# Altium PCB BOARD 1.pcbdoc
Units mil, origin at the board's own origin, x right, y up, seen from the top; angles counter-clockwise.
Board outline 5016 x 3650 mil, 2 copper layers (TopLayer, BottomLayer); 37 components, 98 nets, 554 pads, 0 vias.
Unrouted connection lines stored in the file: 286.
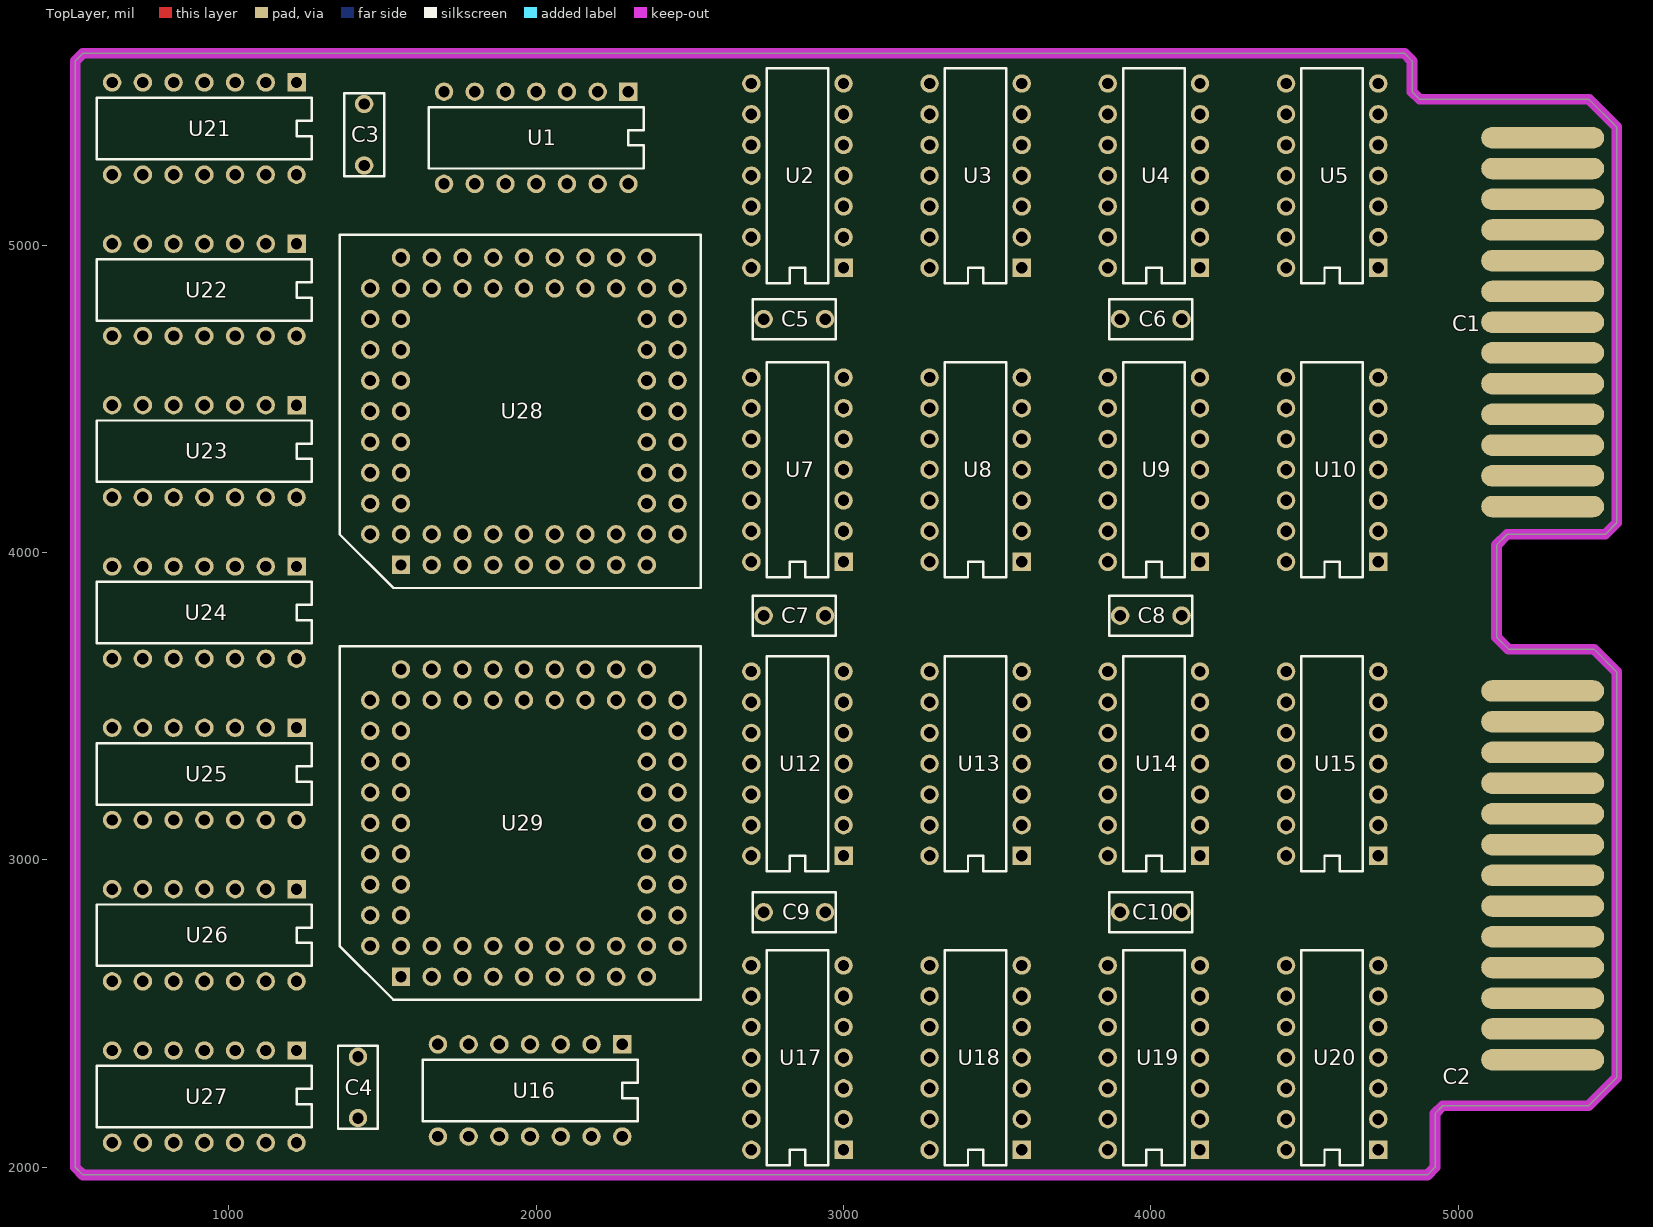
[diagram p0: TopLayer view]
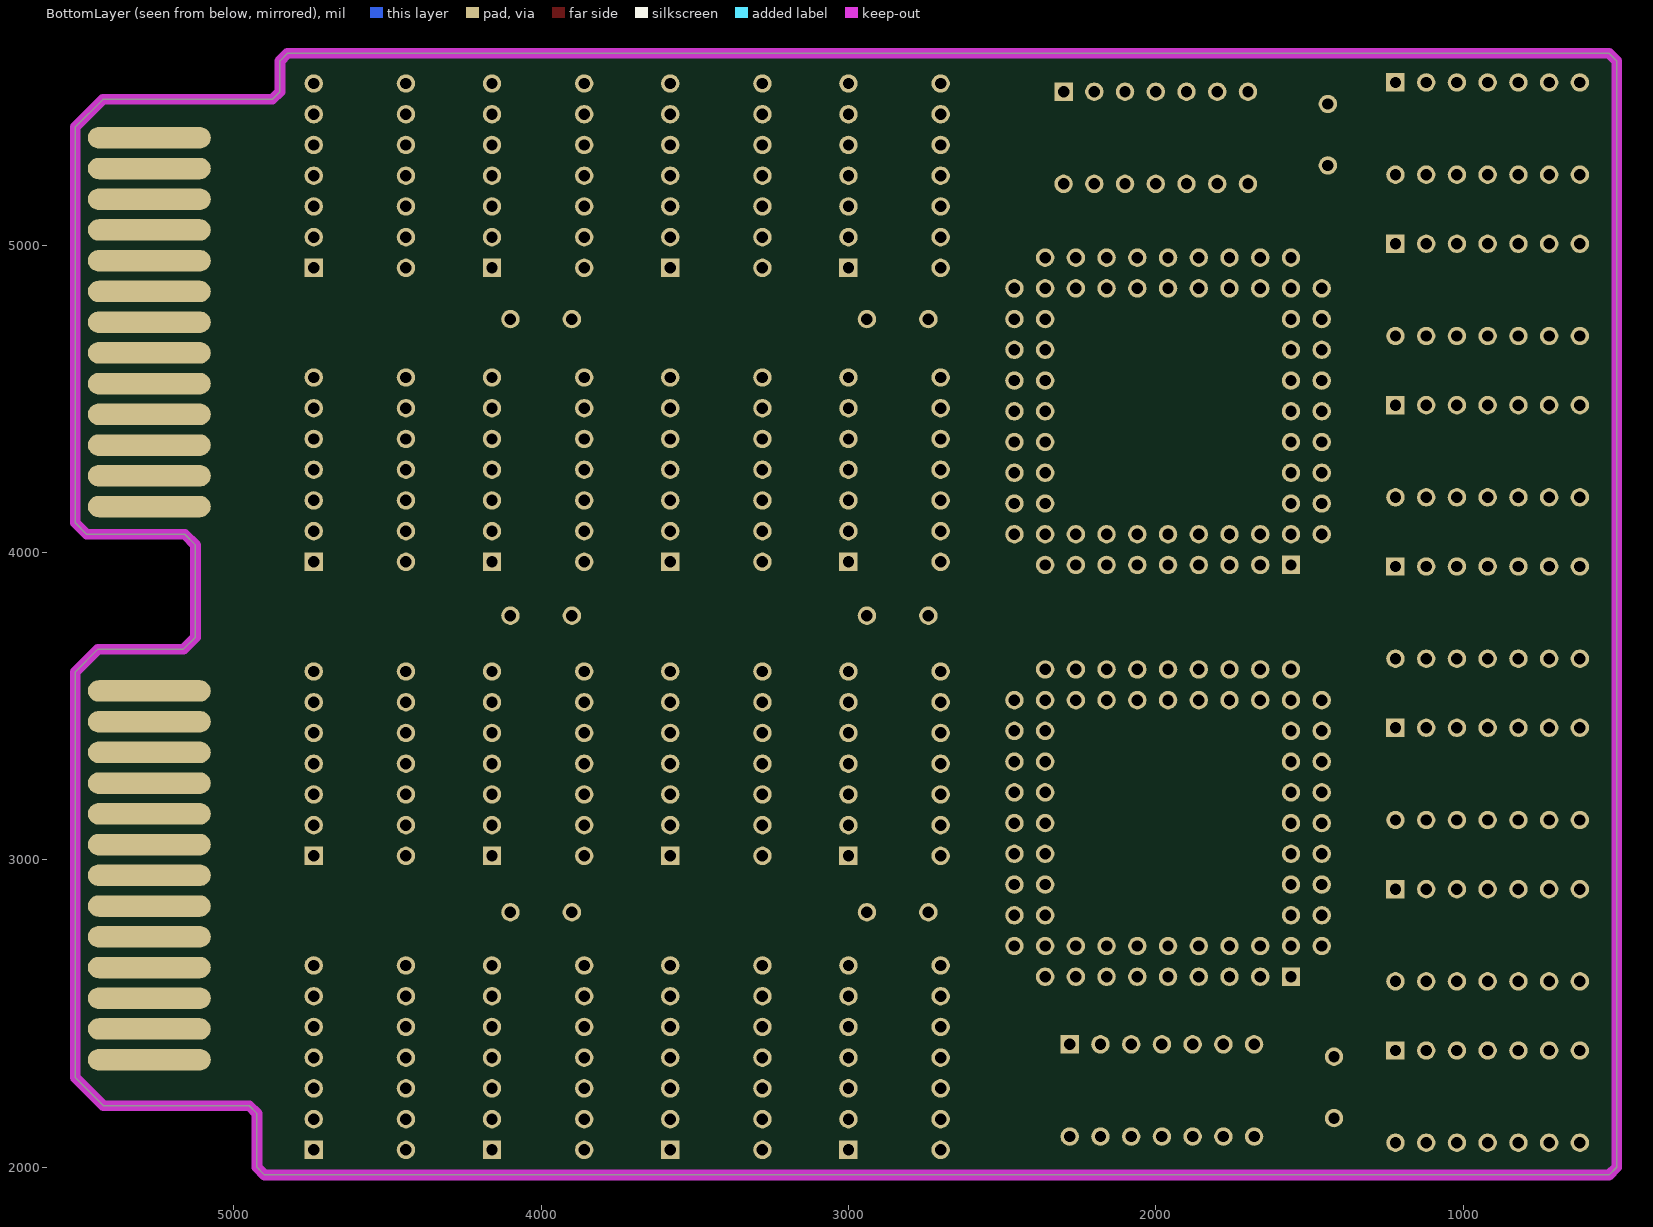
[diagram p1: BottomLayer view, seen from below]

## Layer stack, top to bottom
TopLayer: signal copper 1.4
Dielectric: core 12.6, FR-4, Dk 4.8
BottomLayer: signal copper 1.4

## Board outline
500,2000 525,1975 4900,1975 4925,2000 4925,2175 4950,2200 5424,2200 5516,2292 5516,3612 5442,3686 5164,3686 5125,3725 5125,4025 5160,4060 5479,4060 5516,4097 5516,5385 5426,5475 4875,5475 4850,5500 4850,5600 4825,5625 525,5625 500,5600 500,2000

## Design rules (kind name [scope] priority, off if disabled: settings)
Clearance [All] p1: gap=13
FabricationTestPointUsage TestPointUsage [All] p1: valid=0 allowmultiple=FALSE
FabricationTestpoint Testpoint [All] p1: side=3 testpointundercomponent=TRUE minsize=40 maxsize=100 preferedsize=60 minholesize=20 maxholesize=40 preferedholesize=32 testpointgrid=1 allowsidetop=TRUE allowsidebottom=TRUE usegrid=TRUE gridtolerance=0.01
PlaneClearance [All] p1: clearance=10
PolygonConnect [All] p1: connectstyle=Relief reliefconductorwidth=10 reliefentries=4 polygonreliefangle="90 Angle"
RoutingPriority RoutingPriority_Power [InNetClass('Power')] p1: routingpriority=10
RoutingPriority [All] p2: routingpriority=0
RoutingTopology [InNet('GND')] p1: topology=Vertical
RoutingTopology RoutingTopology_1 [InNet('VCC')] p2: topology=Vertical
RoutingTopology RoutingTopology_2 [All] p3: topology=Shortest
RoutingVias [All] p1: holewidth=20 width=50 viastyle="Through Hole" minholewidth=20 minwidth=50 maxholewidth=20 maxwidth=50
SilkscreenOverComponentPads [All] p1: minsilkscreentomaskgap=10
SolderMaskExpansion [All] p1: expansion=2
Width Width_Power [InNetClass('Power')] p1: maxlimit=25 minlimit=25 preferedwidth=25
Width Width_All [All] p2: maxlimit=12 minlimit=12 preferedwidth=12
22 further rules are at their usual default settings.

## Classes and differential pairs
net class Power: GND VCC

## Components (designator, comment, footprint, x,y, rotation, side; value= is the part's Value field where it differs from the comment)
C1 "CON\26P\ED" CON\26P\ED 5275,4150 r90 top
C2 "CON\26P\ED" CON\26P\ED 5275,2350 r90 top
C3 "CAP" DCAP\SR21 1440,5260 r90 top
C4 "CAP" DCAP\SR21 1420,2160 r90 top
C5 "CAP" DCAP\SR21 2940,4760 r180 top
C6 "CAP" DCAP\SR21 4100,4760 r180 top
C7 "CAP" DCAP\SR21 2940,3795 r180 top
C8 "CAP" DCAP\SR21 4100,3795 r180 top
C9 "CAP" DCAP\SR21 2940,2830 r180 top
C10 "CAP" DCAP\SR21 4100,2830 r180 top
U1 "7404" DIP14 2300,5500 r180 top
U2 "7404" DIP14 3000,4926.67 r90 top
U3 "7404" DIP14 3580,4926.67 r90 top
U4 "7404" DIP14 4160,4926.67 r90 top
U5 "7404" DIP14 4740,4926.67 r90 top
U7 "7404" DIP14 3000,3970 r90 top
U8 "7404" DIP14 3580,3970 r90 top
U9 "7404" DIP14 4160,3970 r90 top
U10 "7404" DIP14 4740,3970 r90 top
U12 "7404" DIP14 3000,3013.33 r90 top
U13 "7404" DIP14 3580,3013.33 r90 top
U14 "7404" DIP14 4160,3013.33 r90 top
U15 "7404" DIP14 4740,3013.33 r90 top
U16 "7404" DIP14 2280,2400 r180 top
U17 "7404" DIP14 3000,2056.67 r90 top
U18 "7404" DIP14 3580,2056.67 r90 top
U19 "7404" DIP14 4160,2056.67 r90 top
U20 "7404" DIP14 4740,2056.67 r90 top
U21 "7404" DIP14 1220,5530 r180 top
U22 "7404" DIP14 1220,5005 r180 top
U23 "7404" DIP14 1220,4480 r180 top
U24 "7404" DIP14 1220,3955 r180 top
U25 "7404" DIP14 1220,3430 r180 top
U26 "7404" DIP14 1220,2905 r180 top
U27 "7404" DIP14 1220,2380 r180 top
U28 "8397" PGA\68P 1560,3960 r0 top
U29 "8397" PGA\68P 1560,2620 r0 top

## Footprints (in the part's own frame and the unit in brackets; to place one, negate y for a bottom-side part, rotate by r counter-clockwise, add the part's x,y. Pads: shape width x height; smd on the part's side, far side on the other; paste and mask are expansions set on the pad)
CON\26P\ED [mil]
  oval 70x400 smd: 1(0,0) 3(100,0) 5(200,0) 7(300,0) 9(400,0) 11(500,0) 13(600,0) 15(700,0) 17(800,0) 19(900,0) 21(1000,0) 23(1100,0) 25(1200,0)
  oval 70x400 smd far side: 2(0,0) 4(100,0) 6(200,0) 8(300,0) 10(400,0) 12(500,0) 14(600,0) 16(700,0) 18(800,0) 20(900,0) 22(1000,0) 24(1100,0) 26(1200,0)
DCAP\SR21 [mil]
  round 60 hole 37: 1(0,0) 2(200,0)
  silkscreen extent -35,-65 235,65
DIP14 [mil]
  rect 60x60 hole 37: 1(0,0)
  round 60 hole 37: 2(100,0) 3(200,0) 4(300,0) 5(400,0) 6(500,0) 7(600,0) 8(600,300) 9(500,300) 10(400,300) 11(300,300) 12(200,300) 13(100,300) 14(0,300)
  silkscreen extent -50,50 650,250
PGA\68P [mil]
  rect 60x60 hole 37: 1(0,0)
  round 60 hole 37: 2(0,100) 3(100,0) 4(100,100) 5(200,0) 6(200,100) 7(300,0) 8(300,100) 9(400,0) 10(400,100) 11(500,0) 12(500,100) 13(600,0) 14(600,100) 15(700,0) 16(700,100) 17(800,0) 18(900,100) 19(800,100) 20(900,200) 21(800,200) 22(900,300) 23(800,300) 24(900,400) 25(800,400) 26(900,500) 27(800,500) 28(900,600) 29(800,600) 30(900,700) 31(800,700) 32(900,800) 33(800,800) 34(900,900) 35(800,1000) 36(800,900) 37(700,1000) 38(700,900) 39(600,1000) 40(600,900) 41(500,1000) 42(500,900) 43(400,1000) 44(400,900) 45(300,1000) 46(300,900) 47(200,1000) 48(200,900) 49(100,1000) 50(100,900) 51(0,1000) 52(-100,900) 53(0,900) 54(-100,800) 55(0,800) 56(-100,700) 57(0,700) 58(-100,600) 59(0,600) 60(-100,500) 61(0,500) 62(-100,400) 63(0,400) 64(-100,300) 65(0,300) 66(-100,200) 67(0,200) 68(-100,100)
  silkscreen extent -200,-75 975,1075

## Nets (pads, with @x,y where several pads share a name; then routed paths per layer and width w, separated by ;. In a path a pad name is that pad's centre, name@x,y a point inside that pad or via, vN(x,y) a via of type N, cw(c..) or ccw(c..) an arc to the next point about the centre after c; other vN are vias at no path point)
DY: U21.10 U22.10 U23.10 U24.10 U25.10 U26.10 U27.10 U29.54
F: U21.5 U22.5 U23.5 U24.5 U25.5 U26.5 U27.5 U28.64
GND: C2.1 C3.1 C4.1 C5.2 C6.2 C7.2 C8.2 C9.2 C10.2 U1.14 U2.14 U3.14 U4.14 U5.14 U7.14 U8.14 U10.14 U12.14 U13.14 U14.14 U15.14 U16.14 U17.14 U18.14 U19.14 U20.14 U21.14 U22.14 U23.14 U24.14 U25.14 U26.14 U27.14 U28.51 U29.51
NetC1_1: C1.1 U19.4
NetC1_2: C1.2 U14.6
NetC1_5: C1.5 U7.9 U14.10 U29.57
NetC1_6: C1.6 U9.6
NetC1_9: C1.9 U13.2
NetC1_11: C1.11 U3.2 U5.12 U17.4
NetC1_12: C1.12 U4.8
NetC1_15: C1.15 U12.13
NetC1_17: C1.17 U5.4
NetC1_21: C1.21 U7.11
NetC1_22: C1.22 U5.13
NetC1_23: C1.23 U9.10
NetC1_25: C1.25 U4.6
NetC2_3: C2.3 U7.8
NetC2_7: C2.7 U19.9
NetC2_9: C2.9 U13.5 U29.59
NetC2_13: C2.13 U28.26
NetC2_17: C2.17 U9.9 U10.13 U19.5
NetC2_19: C2.19 U28.63 U29.12
NetC2_23: C2.23 U18.6
NetC2_25: C2.25 U3.3
NetU1_2: U1.2 U8.1 U14.1 U20.6
NetU1_5: U1.5 U10.1 U18.9
NetU1_6: U1.6 U7.10 U14.5 U20.3
NetU1_10: U1.10 U8.10 U17.10
NetU1_11: U1.11 U28.47
NetU1_13: U1.13 U2.6 U7.2 U16.13
NetU2_1: U2.1 U28.32
NetU2_2: U2.2 U28.44
NetU2_4: U2.4 U20.5
NetU2_5: U2.5 U9.5
NetU2_9: U2.9 U28.55
NetU2_10: U2.10 U28.46
NetU2_11: U1.3 U2.11 U8.5 U10.5 U14.9 U20.4 U28.49
NetU2_12: U2.12 U3.13 U13.6 U20.9
NetU2_13: U2.13 U3.12 U7.12 U10.2 U13.3 U18.13 U28.28
NetU3_5: U3.5 U28.22
NetU3_6: U3.6 U28.61
NetU3_9: U3.9 U28.65
NetU3_10: U3.10 U5.5 U12.10 U16.1
NetU4_2: U4.2 U5.9 U10.11 U14.3
NetU4_3: U4.3 U9.13 U10.6
NetU4_4: U1.4 U4.4 U8.3
NetU4_9: U4.9 U5.3 U10.10 U14.13 U17.12
NetU4_10: U4.10 U15.2
NetU4_13: U4.13 U8.6 U13.11 U17.13
NetU5_6: U5.6 U8.9 U12.9 U13.12 U14.4
NetU7_13: U7.13 U10.9 U16.12
NetU8_4: U8.4 U15.4 U19.11
NetU8_8: U8.8 U28.68
NetU9_11: U9.11 U15.12 U16.11
NetU10_4: U10.4 U12.8
NetU12_1: U12.1 U28.12 U28.50
NetU12_2: U12.2 U14.2
NetU12_3: U12.3 U18.2 U20.1 U20.11
NetU12_6: U12.6 U29.33
NetU12_12: U12.12 U29.42
NetU13_4: U13.4 U15.9 U19.1
NetU13_13: U13.13 U29.25
NetU15_3: C2.24 U15.3
NetU15_5: C2.8 U15.5
NetU15_10: U15.10 U19.10 U20.2
NetU15_11: U15.11 U16.10 U19.12
NetU15_13: C2.4 U15.13
NetU16_2: U16.2 U29.13
NetU16_3: U16.3 U29.5
NetU16_4: U16.4 U29.9 U29.58
NetU16_6: U16.6 U18.3
NetU16_9: U16.9 U29.29
NetU17_2: U17.2 U20.8
NetU17_6: U17.6 U29.63
NetU17_9: U17.9 U29.20
NetU20_10: C2.15 U20.10
NetU20_13: C2.11 U20.13
NetU21_1: U21.1 U22.1 U23.1 U24.1 U25.1 U26.1 U27.1 U28.57
NetU21_2: U21.2 U22.2 U23.2 U24.2 U25.2 U26.2 U27.2 U28.58
NetU21_3: U21.3 U22.3 U23.3 U24.3 U25.3 U26.3 U27.3 U28.60
NetU21_4: U21.4 U22.4 U23.4 U24.4 U25.4 U26.4 U27.4 U28.62
NetU21_6: U21.6 U22.6 U23.6 U24.6 U25.6 U26.6 U27.6 U28.66
NetU21_8: U21.8 U22.8 U23.8 U24.8 U25.8 U26.8 U27.8
NetU21_9: U21.9 U22.9 U23.9 U24.9 U25.9 U26.9 U27.9 U29.52
NetU21_11: U21.11 U22.11 U23.11 U24.11 U25.11 U26.11 U27.11 U29.56
NetU21_12: U21.12 U22.12 U23.12 U24.12 U25.12 U26.12 U27.12 U29.60
NetU21_13: U21.13 U22.13 U23.13 U24.13 U25.13 U26.13 U27.13 U29.62
NetU28_9: U28.9 U29.43
NetU28_11: U28.11 U29.35
NetU28_15: U28.15 U29.28
NetU28_16: U28.16 U28.59
NetU28_17: U28.17 U29.6
NetU28_18: U28.18 U29.2
NetU28_20: U28.20 U28.54
NetU28_27: U28.27 U29.4
NetU29_16: U29.16 U29.45
NetU29_22: U29.22 U29.61
VCC: C1.3 C3.2 C4.2 C5.1 C6.1 C7.1 C8.1 C9.1 C10.1 U1.7 U2.7 U3.7 U4.7 U5.7 U7.7 U8.7 U9.7 U10.7 U14.7 U15.7 U16.7 U17.7 U18.7 U19.7 U20.7 U21.7 U22.7 U23.7 U24.7 U25.7 U26.7 U27.7 U28.34 U29.34
pads on no net: C1.4 C1.7 C1.8 C1.10 C1.13 C1.14 C1.16 C1.18 C1.19 C1.20 C1.24 C1.26 C2.2 C2.5 C2.6 C2.10 C2.12 C2.14 C2.16 C2.18 C2.20 C2.21 C2.22 C2.26 U1.1 U1.8 U1.9 U1.12 U2.3 U2.8 U3.1 U3.4 U3.8 U3.11 U4.1 U4.5 U4.11 U4.12 U5.1 U5.2 U5.8 U5.10 U5.11 U7.1 U7.3 U7.4 U7.5 U7.6 U8.2 U8.11 U8.12 U8.13 U9.1 U9.2 U9.3 U9.4 U9.8 U9.12 U9.14 U10.3 U10.8 U10.12 U12.4 U12.5 U12.7 U12.11 U13.1 U13.7 U13.8 U13.9 U13.10 U14.8 U14.11 U14.12 U15.1 U15.6 U15.8 U16.5 U16.8 U17.1 U17.3 U17.5 U17.8 U17.11 U18.1 U18.4 U18.5 U18.8 U18.10 U18.11 U18.12 U19.2 U19.3 U19.6 U19.8 U19.13 U20.12 U28.1 U28.2 U28.3 U28.4 U28.5 U28.6 U28.7 U28.8 U28.10 U28.13 U28.14 U28.19 U28.21 U28.23 U28.24 U28.25 U28.29 U28.30 U28.31 U28.33 U28.35 U28.36 U28.37 U28.38 U28.39 U28.40 U28.41 U28.42 U28.43 U28.45 U28.48 U28.52 U28.53 U28.56 U28.67 U29.1 U29.3 U29.7 U29.8 U29.10 U29.11 U29.14 U29.15 U29.17 U29.18 U29.19 U29.21 U29.23 U29.24 U29.26 U29.27 U29.30 U29.31 U29.32 U29.36 U29.37 U29.38 U29.39 U29.40 U29.41 U29.44 U29.46 U29.47 U29.48 U29.49 U29.50 U29.53 U29.55 U29.64 U29.65 U29.66 U29.67 U29.68

## Keep-outs
KeepOutLayer:
  the board outline again, w35